# Altium PCB Pannel3.5x3.PcbDoc (part 4 of 4)
Units mil, origin at the board's own origin, x right, y up, seen from the top; angles counter-clockwise.
Board outline 3543.31 x 2771.65 mil, 4 copper layers (SIGNAL, GROUND, PWR, SIGNAL (Bottom)), stack 61.627 mil thick; 248 components, 189 nets, 921 pads, 651 vias.
Unrouted connection lines stored in the file: 1.
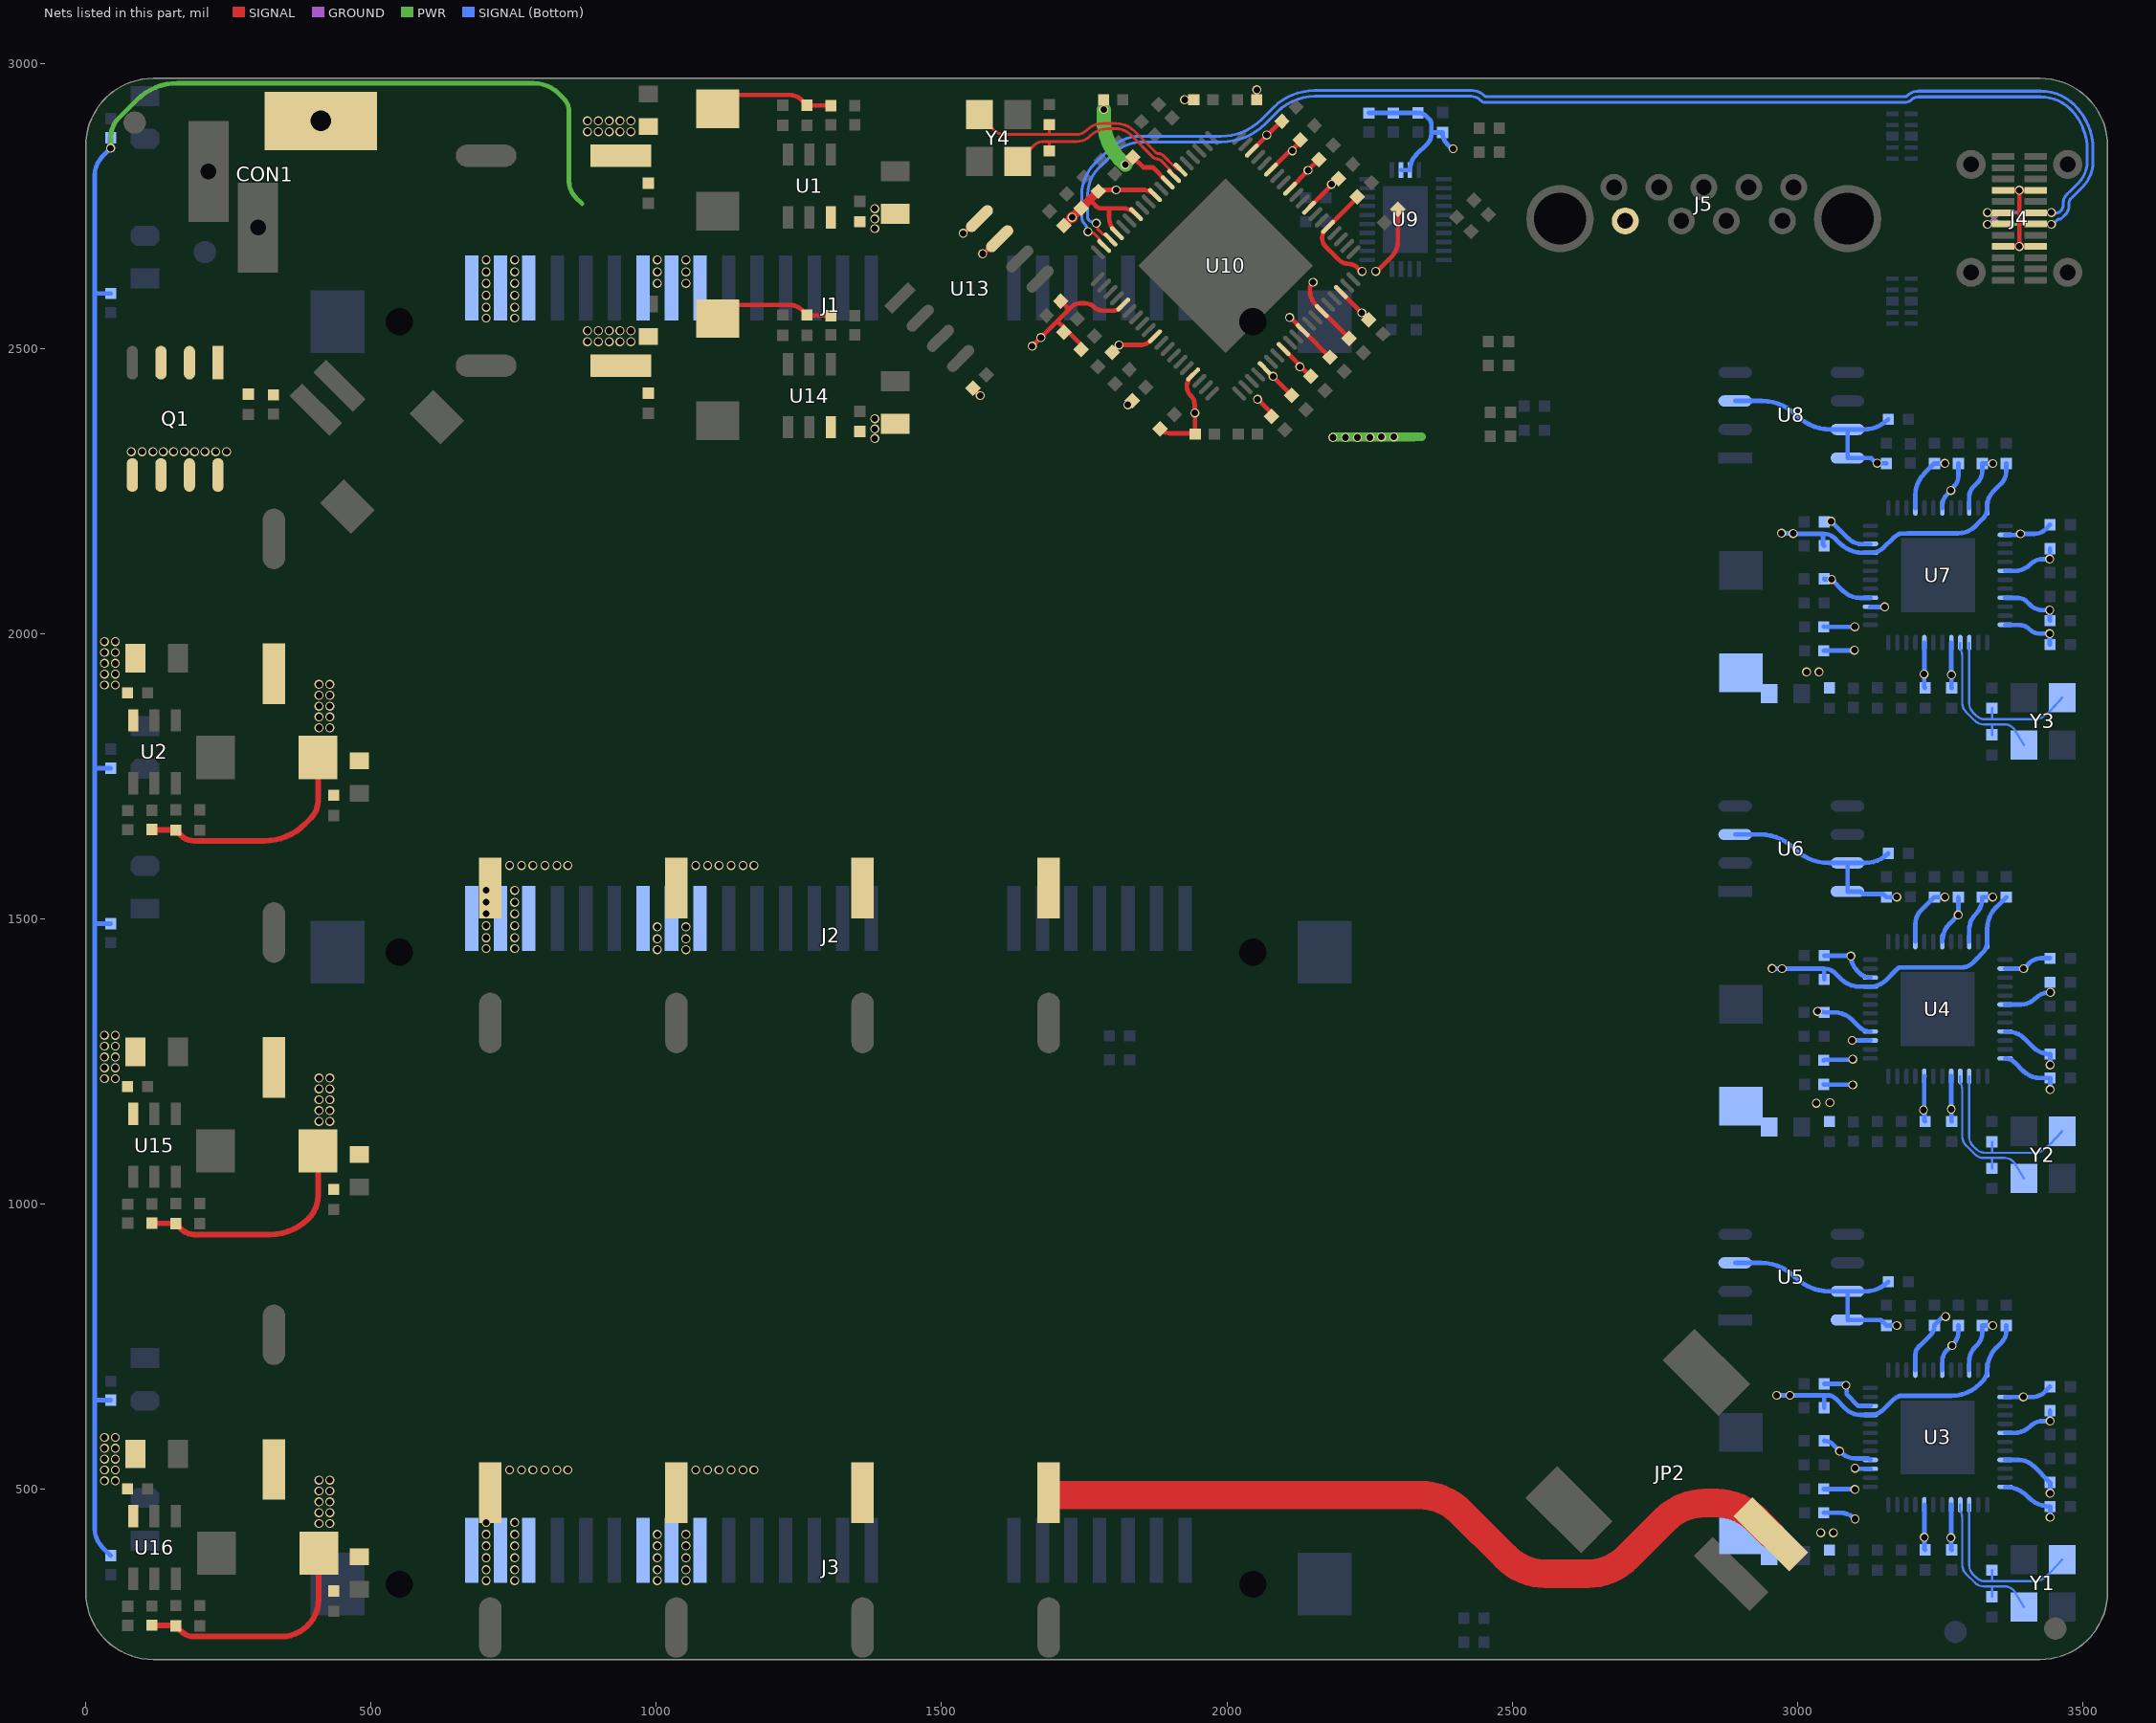
[diagram p6: the nets of this part, all layers, seen from the top]

## Via types
v1: diameter 15.75, hole 11.81, SIGNAL to SIGNAL (Bottom), tented both sides, 651 vias

## Nets (pads, with @x,y where several pads share a name; then routed paths per layer and width w, separated by ;. In a path a pad name is that pad's centre, name@x,y a point inside that pad or via, vN(x,y) a via of type N, cw(c..) or ccw(c..) an arc to the next point about the centre after c; other vN are vias at no path point) (continued)
USBD_N: J4.A7 J4.B7 U10.56 | length 2361.9
  SIGNAL w5.1: v1(1756.66,2704.66) 1758.69,2702.62 1766.22,2702.62 1769.64,2699.2 1776.14,2692.7 1776.14,2688.67 U10.56@1785.02,2679.79 ; v1(3333,2738.38) 3333.26,2738.11 3360.39,2738.11 J4.B7@3360.66,2737.85 ; J4.A7@3417.35,2718.16 3417.61,2717.89 3444.73,2717.89 v1(3445,2717.63)
  PWR w5.1: v1(3333,2738.38) 3334.06,2738.38 3344.44,2728 ccw(c3369.49,2753.05) 3369.49,2717.63 v1(3445,2717.63)
  SIGNAL (Bottom) w5.1: 1751.3,2717.54 cw(c1764.61,2730.83) 1745.8,2730.83 1745.8,2769.32 cw(c1822.49,2769.32) 1768.26,2823.55 1794.02,2849.3 ; 1751.35,2717.49 cw(c1743.4,2709.57) 1754.62,2709.57 ccw(c1761.57,2709.57) v1(1756.66,2704.66) ; 1794.03,2849.31 cw(c1848.82,2794.5) 1848.82,2872 1989.99,2872 ccw(c1989.99,2972) 2060.7,2901.29 2081.65,2922.24 cw(c2153.74,2850.15) 2153.74,2952.1 2430.42,2952.1 cw(c2430.42,2924.38) 2450.02,2943.98 ; 2450.03,2943.97 ccw(c2456.87,2950.84) 2456.87,2941.14 3187.93,2941.14 ccw(c3187.93,2948.22) 3192.92,2943.21 ; 3192.95,2943.23 cw(c3211.97,2924.18) 3211.97,2951.1 3426.42,2951.1 cw(c3426.42,2867.17) 3485.77,2926.52 3485.99,2926.3 cw(c3408.36,2848.67) 3518.14,2848.67 3518.14,2828.22 cw(c3453.54,2828.22) 3499.27,2782.59 cw(c3453.54,2828.22) 3499.22,2782.54 3480.24,2763.56 3479.96,2763.56 ccw(c3489.51,2754.01) 3478.45,2761.77 ccw(c3489.51,2754.01) 3476,2754.01 3476,2750.21 cw(c3454.01,2750.21) 3469.56,2734.66 3463.36,2728.46 cw(c3459.4,2732.43) 3459.4,2726.82 ccw(c3459.4,2721.21) 3455.43,2725.18 ; v1(3445,2717.63) ccw(c3445,2724.58) 3449.92,2719.66 3455.43,2725.17
USBD_P: J4.A6 J4.B6 U10.55 | length 2302.2
  SIGNAL w5.1: v1(1771.33,2719.33) 1773.36,2717.29 1773.36,2709.76 1779.74,2703.38 1783.28,2699.84 1787.31,2699.84 U10.55@1796.19,2690.96 ; v1(3333,2717.63) 3333.26,2717.9 3360.39,2717.9 J4.B6@3360.66,2718.16 ; J4.A6@3417.35,2737.84 3417.61,2738.11 3444.73,2738.11 v1(3445,2738.37)
  GROUND w5.1: v1(3333,2717.63) 3334.06,2717.63 3344.44,2728 cw(c3369.48,2702.96) 3369.48,2738.37 v1(3445,2738.37)
  SIGNAL (Bottom) w5.1: v1(1771.33,2719.33) ccw(c1766.41,2714.41) 1766.41,2721.36 cw(c1766.41,2732.59) 1758.47,2724.65 cw(c1764.68,2730.86) 1755.9,2730.86 1755.9,2769.19 cw(c1822.81,2769.19) 1775.48,2816.48 1798.2,2839.2 cw(c1853,2784.4) 1798.24,2839.24 cw(c1853,2784.4) 1853,2861.9 1990.04,2861.9 ccw(c1990.04,2971.87) 2067.8,2894.11 2088.32,2914.63 cw(c2154.4,2848.55) 2154.4,2942 2428.32,2942 cw(c2428.32,2919.32) 2444.36,2935.36 ccw(c2454.78,2945.78) 2454.78,2931.04 3188,2931.04 ccw(c3188,2948.04) 3200.02,2936.02 cw(c3212.04,2924) 3212.04,2941 3426.24,2941 cw(c3426.24,2866.73) 3478.72,2919.28 ; v1(3445,2738.37) ccw(c3448.52,2741.89) 3448.52,2736.92 3451.62,2736.92 ccw(c3451.62,2751.19) 3461.72,2741.1 ccw(c3451.62,2751.19) 3465.9,2751.19 3465.9,2755.38 cw(c3486.2,2755.38) 3469.96,2767.56 cw(c3486.2,2755.38) 3471.85,2769.73 3475.77,2773.66 3476.06,2773.66 3492.05,2789.65 ccw(c3453.45,2828.25) 3508.04,2828.25 3508.04,2848.54 ccw(c3408.04,2848.54) 3478.75,2919.25
VBUS: C5.2 C6.2 C54.2 C55.2 C60.2 C61.2 C86.2 C87.2 C96.2 C129.2 C130.2 J4.A4 J4.A9 J4.B4 J4.B9 J5.1 R38.1 R39.1 R45.2 U1.3 U3.12 U3.45 U4.12 U4.45 U7.12 U7.45 U9.26 U9.27 U14.3 | length 2377.3
  SIGNAL w8: J4.B4@3360.66,2678.79 v1(3389,2678.79) ; J4.B9@3360.66,2777.21 v1(3389,2777.21) ; J4.A9@3417.35,2678.79 v1(3389,2678.79) ; J4.A4@3417.35,2777.21 v1(3389,2777.21) ; v1(3389,2678.79) v1(3389,2777.21)
  PWR w15: v1(2186,2344) v1@2186.2,2344 ; v1@2293,2344.65 v1@2292.65,2345 ; 2341,2345 2329,2345 ; v1@2186.2,2344 v1(2208,2344) v1(2229,2344) v1(2251,2344) ; v1@2186.2,2344 2187.2,2345 v1@2270.8,2345 ; v1(2251,2344) 2328,2344 2329,2345 ; v1(2251,2344) 2251.14,2344.14 2269.94,2344.14 v1@2270.8,2345 ; v1@2270.8,2345 v1(2271,2345) v1@2292.65,2345 ; v1@2292.65,2345 v1(2293,2345) 2329,2345
  SIGNAL (Bottom) w8: R38.1@2249,2912.73 2249.25,2912.99 R45.2@2335,2912.99 cw(c2335,2891.22) 2350.39,2906.61 2355,2902 cw(c2346.9,2893.9) 2358.35,2893.9 2358.35,2875.43 cw(c2335.18,2875.43) 2357.6,2869.56 cw(c2335.18,2875.43) 2351.57,2859.04 2332.01,2839.49 ccw(c2358.87,2812.62) U9.27@2320.88,2812.62 U9.26@2305.13,2812.62 ; 2359.59,2878.41 C96.2@2378,2878.41 ccw(c2406.87,2878.41) 2386.46,2858 2394.68,2849.77 v1(2396.6,2849.99) ; v1(2955.57,1413) 2955.66,1412.91 2973.06,1412.91 v1(2973.15,1412.82) 2979.95,1412.82 2980.01,1412.87 3047,1412.87 ; v1(2963.83,664.82) v1(2987,664.82) 3053,664.82 cw(c3053,645.06) 3066.96,659.04 3085,641 ccw(c3110.66,666.66) 3110.66,630.37 U3.45@3127.89,630.37 ccw(c3127.89,662.91) 3129.91,630.43 ccw(c3127.89,662.91) 3150.89,639.89 3168.57,657.57 ; v1(2972,2176) 2972.18,2175.82 2992.5,2175.82 v1(2992.68,2175.63) ; v1@2993,2176 2994,2175 3044,2175 ; C54.2@3047,643 3047,661 ; C60.2@3047,1394 3047,1412.87 ; C86.2@3047,2154 3044.84,2156.16 3044.84,2174.16 3044,2175 ; 3074.82,2158.18 3066.41,2166.59 ccw(c3046.11,2146.3) 3046.11,2175 3044,2175 ; 3074.84,2158.16 ccw(c3114.5,2197.87) 3114.5,2141.75 U7.45@3128,2141.75 ccw(c3128,2175.57) 3151.92,2151.65 3166.55,2166.29 cw(c3190,2142.83) 3171.04,2170.05 3176.58,2173.9 cw(c3181.15,2167.34) 3181.15,2175.34 3183.13,2175.34 ccw(c3183.13,2183.34) 3183.68,2175.36 3193,2176 3281.59,2176 ccw(c3281.59,2219.18) 3312.11,2188.63 ; 3076.1,1394.9 3065.99,1405.01 ccw(c3047,1386.01) 3047,1412.87 ; 3076.13,1394.87 ccw(c3108.76,1427.55) 3108.76,1381.37 U4.45@3127.89,1381.37 ccw(c3127.89,1420.59) 3130.11,1381.43 ccw(c3127.89,1420.59) 3155.61,1392.84 3173.04,1410.27 3175.38,1412.62 cw(c3181.04,1406.96) 3181.04,1414.96 3288.24,1414.96 ccw(c3288.24,1440.85) 3306.54,1422.54 3314.13,1430.13 3314.13,1430.23 3324.56,1440.66 ccw(c3305.11,1460.11) U4.12@3332.61,1460.11 3332.61,1482.5 cw(c3386.68,1482.5) 3348.45,1520.73 C61.2@3366,1538.28 ; 3168.59,657.59 cw(c3184,642.14) 3175.06,662.05 3177.76,663.26 cw(c3181.04,655.96) 3181.04,663.96 3269.89,663.96 ccw(c3269.89,733.9) 3319.33,684.43 3324.56,689.66 ccw(c3305.11,709.11) U3.12@3332.61,709.11 cw(c3389.36,709.11) 3349.21,749.21 ; 3312.13,2188.65 3324.77,2201.29 ; 3324.79,2201.31 ccw(c3305.58,2220.49) 3332.61,2218.05 ccw(c3305.58,2220.49) U7.12@3332.72,2220.49 ; U7.12@3332.61,2223.87 cw(c3368.2,2223.87) 3343.04,2249.04 3356.71,2262.71 ccw(c3334.27,2285.14) 3366,2285.14 C87.2@3366,2298.28 ; 3349.23,749.23 3358.47,758.47 ; 3358.47,758.47 ccw(c3340.31,776.64) 3366,776.64 C55.2@3366,787.28
  other v1: 1383,2342 1383,2359 1383,2377 1383,2710 1383,2727 1383,2745
VCC1.05V-VL822: C1.1 C9.2 C11.1 C115.2 C116.2 C117.2 C118.2 C119.2 C120.2 C121.2 C122.2 C123.2 C124.2 C125.2 C126.2 E9.1 L1.2 R1.1 U10.5 U10.8 U10.11 U10.14 U10.27 U10.30 U10.33 U10.36 U10.48 U10.51 U10.54 U10.67 | length 1296
  SIGNAL w8: L1.2@1108,2920.37 1131.91,2944.28 1233.54,2944.28 cw(c1233.54,2913.82) C9.2@1255.06,2935.37 ; C9.2@1255.08,2935.35 C9.2@1264,2926.43 1264.48,2925.95 1305.52,2925.95 R1.1@1306,2925.46 ; C116.2@1714.53,2715.47 v1(1729,2730) ; 1759.53,2760.47 1769.64,2750.36 ccw(c1781.43,2762.14) 1781.43,2745.47 1793.63,2745.47 ; C125.2@1774.53,2775.47 1782.79,2775.47 1785.39,2778.07 1851.94,2778.07 ; C120.2@1799,2493 1799,2493.53 v1@1811.06,2505.59 ; U10.54@1807.29,2702.06 1804.15,2705.2 cw(c1829.55,2730.6) 1793.63,2730.6 1793.63,2745.47 ; v1@1812.59,2506.13 1848.44,2506.13 ccw(c1848.44,2531.71) U10.67@1866.52,2513.6 ; U10.51@1840.74,2735.51 ccw(c1816.69,2711.46) 1816.69,2745.47 1793.63,2745.47 ; 1854.71,2778.07 cw(c1854.66,2766.14) 1857.95,2777.61 1860.57,2776.86 cw(c1851.94,2746.71) 1872.67,2770.25 cw(c1851.94,2746.71) U10.48@1874.12,2768.89 ; U10.67@1866.53,2513.62 1874.03,2521.11 U10.67@1874.12,2521.11 ; U10.36@2043.96,2846.81 2043.96,2846.9 2070,2872.94 v1(2070,2874) 2071,2874 2095.47,2898.47 C118.2@2096.47,2898.47 ; U10.33@2077.34,2813.43 v1@2111.95,2848.05 ; v1@2081.05,2450.48 2113.47,2418.06 C121.2@2113.47,2417.53 ; U10.8@2099.61,2498.84 2126.52,2471.93 2126.52,2469.48 v1(2128,2468) 2129.5,2468 2145.97,2451.53 C126.2@2147.47,2451.53 ; v1(2110.19,2554.2) 2110.91,2554.2 2132.9,2532.22 U10.11@2132.99,2532.22 2158.8,2506.41 2158.8,2506.2 C117.2@2180.47,2484.53 ; U10.30@2110.78,2779.99 2142.4,2811.6 v1(2142.4,2812.4) C123.2@2161.47,2831.47 ; v1(2114.87,2846.48) 2114.87,2848.57 2128.47,2862.17 C119.2@2128.47,2865.47 ; U10.27@2144.16,2746.61 v1@2183.48,2785.92 ; v1(2151.09,2616.03) ccw(c2164.72,2602.4) 2146.89,2609.74 ccw(c2164.72,2602.4) 2145.44,2602.4 ccw(c2183.22,2602.4) 2156.5,2575.68 2198.18,2534 2199,2534 2199,2533.5 2214.47,2518.03 C124.2@2214.47,2517.53 ; v1@2185,2787.21 C122.2@2195.26,2797.47
  SIGNAL w15: C116.2@1714.53,2715.47 v1@1729.05,2730 ; C115.2@1744.53,2745.47 v1(1729,2730) ; C125.2@1774.53,2775.47 1759.53,2760.47 C115.2@1744.53,2745.47 v1@1729.05,2730
  other v1: 2081.05,2451.02 1811.06,2506.13 1806,2778 2183.48,2787.72 879.57,2880 898.57,2880 917.57,2880 936.57,2880 955.57,2880 879.57,2899 898.57,2899 917.57,2899 936.57,2899 955.57,2899
VCC1V2-A: C32.2 C33.2 C38.2 C39.2 C40.2 C41.2 C42.2 C43.2 C44.2 C45.2 L4.2 U3.4 U3.10 U3.18 U3.21 U3.24 U3.29 U3.32 U3.40 | length 793
  SIGNAL (Bottom) w8: C43.2@3047,585 cw(c3047,563.27) 3062.36,578.64 v1(3074,567) 3075.93,565.07 ccw(c3102.31,591.44) 3084.34,558.75 ccw(c3102.31,591.44) 3102.31,554.14 3121.83,554.14 cw(c3121.83,545.57) U3.40@3127.89,551.63 ; U3.4@3206.63,709.11 3206.69,709.17 3206.69,726.43 3206.71,735.85 ccw(c3198.71,735.88) 3206.7,736.13 cw(c3223.57,736.7) 3206.69,736.7 cw(c3223.57,736.7) 3211.61,748.61 ; 3211.64,748.64 3215.05,752.05 ccw(c3203.14,764) 3215.09,752.09 3220.72,757.72 ccw(c3215.09,763.4) 3220.75,757.75 3232.73,769.73 ccw(c3215.17,787.28) 3234.81,772.1 ccw(c3215.17,787.28) C45.2@3240,787.28 3254.23,801.52 3258.11,801.52 v1(3259.59,803) ; U3.32@3222.38,472.89 3222.44,472.83 v1(3222.44,416) 3222.44,395.56 C42.2@3224,394 ; U3.29@3269.62,472.89 3269.62,415.62 v1(3269,415) 3269.61,414.39 3269.61,394.61 C41.2@3270.22,394 ; U3.10@3301.12,709.11 3301.12,724.24 cw(c3337.65,724.24) 3311.81,750.06 3315.15,753.41 ccw(c3293.79,774.77) 3324,774.77 C40.2@3324,787.28 v1(3342.28,787.28) ; U3.24@3364.11,504.39 cw(c3364.11,450.06) 3402.53,488.47 3405.56,485.44 ccw(c3442.84,522.72) C39.2@3442.84,470 3442.92,469.92 3442.92,451.08 v1(3443,451) ; U3.21@3364.11,551.63 3387.79,551.63 cw(c3387.79,514.41) 3414.11,540.73 C38.2@3442.84,512 3442.92,511.92 3442.92,493.08 v1(3443,493) ; U3.18@3364.11,598.87 3379.72,598.87 ccw(c3379.72,639.14) 3408.17,610.65 ; 3408.21,610.68 cw(c3430.04,588.82) 3430.04,619.72 v1(3442.84,619.72) C44.2@3442.84,638
  other v1: 3041,424 3063,424
VCC1V2-B: C34.2 C35.2 C46.2 C47.2 C48.2 C49.2 C50.2 C51.2 C52.2 C53.2 L5.2 U4.4 U4.10 U4.18 U4.21 U4.24 U4.29 U4.32 U4.40 | length 781.2
  SIGNAL (Bottom) w8: v1(3035.28,1338) 3036.28,1337 3046,1337 C51.2@3047,1336 3065.16,1336 cw(c3065.16,1292.94) 3095.58,1323.42 3108.22,1310.78 ccw(c3127.89,1330.44) 3126.02,1302.69 ccw(c3127.89,1330.44) U4.40@3127.89,1302.63 ; U4.4@3206.63,1460.11 3206.63,1491 cw(c3240.22,1491) 3216.45,1514.73 C53.2@3240,1538.28 v1(3258.28,1538.28) ; U4.32@3222.38,1223.89 3222.32,1223.83 3222.32,1166.32 v1(3221,1165) 3222.48,1163.52 3222.48,1146.52 C48.2@3224,1145 ; U4.29@3269.62,1223.89 3269.56,1223.83 v1(3269.56,1166.56) 3269.89,1166.23 3269.89,1145.33 C49.2@3270.22,1145 ; U4.10@3301.12,1460.11 3301.12,1480.94 cw(c3340.18,1480.94) 3312.54,1508.54 ccw(c3284.94,1536.18) 3324,1536.18 C50.2@3324,1538.28 v1(3342.14,1538.28) ; U4.24@3364.11,1255.39 cw(c3364.11,1231.93) 3380.7,1248.52 3395.97,1233.24 ccw(c3425.52,1262.79) 3425.52,1221 C47.2@3442.84,1221 3442.92,1220.92 3442.92,1201.08 v1(3443,1201) ; U4.21@3364.11,1302.63 3368.22,1302.63 cw(c3368.22,1261.22) 3370.5,1302.57 cw(c3368.22,1261.22) 3397.48,1290.52 3412.39,1275.61 ccw(c3442.84,1306.06) C46.2@3442.84,1263 3442.92,1262.92 3442.92,1244.08 v1(3443,1244) ; U4.18@3364.11,1349.87 3391.69,1349.87 ccw(c3391.69,1384.53) 3416.2,1360.03 cw(c3443.42,1332.81) 3432.84,1369.82 cw(c3443.42,1332.81) v1(3443.42,1371.3)
  other v1: 3033,1177 3057,1178
VCC1V2-C: C75.2 C76.2 C78.2 C79.2 C80.2 C81.2 C82.2 C83.2 C84.2 C85.2 L6.2 U7.4 U7.10 U7.18 U7.21 U7.24 U7.29 U7.32 U7.40 | length 769.4
  SIGNAL (Bottom) w8: C85.2@3047,2096 3047.5,2095.5 3059.5,2095.5 v1(3060,2095) 3079.81,2075.19 ccw(c3110.13,2105.51) 3110.13,2062.63 U7.40@3127.89,2062.63 ; U7.4@3206.63,2220.11 3206.63,2242.51 cw(c3260.71,2242.51) 3222.47,2280.75 C79.2@3240,2298.28 3240.36,2298.64 3240.54,2298.46 3258.1,2298.46 v1(3258.28,2298.64) ; U7.32@3222.38,1983.89 3222.44,1983.83 3222.44,1929.44 v1(3222,1929) 3222,1907 C78.2@3224,1905 ; U7.29@3269.62,1983.89 3269.69,1983.83 3269.69,1928.31 v1(3270,1928) 3270.11,1927.89 3270.11,1905.11 C83.2@3270.22,1905 ; U7.10@3301.12,2220.11 3301.12,2240.26 cw(c3324.92,2240.26) 3308.08,2257.08 3315.06,2264.06 ccw(c3293.48,2285.64) 3324,2285.64 C80.2@3324,2298.28 v1(3342.28,2298.28) ; U7.24@3364.11,2015.39 3388.32,2015.39 cw(c3388.32,1989.12) 3406.89,2007.7 ccw(c3425.47,2026.27) 3425.47,2000 v1(3442,2000) 3442.42,1999.58 3442.42,1981.42 C81.2@3442.84,1981 ; U7.21@3364.11,2062.63 3386.84,2062.63 cw(c3386.84,2041.18) 3401.99,2056.37 3408.29,2050.06 ccw(c3429.49,2071.26) 3429.49,2041.28 v1(3441.91,2041.28) ; U7.18@3364.11,2109.87 3380.29,2109.87 ccw(c3380.29,2148.94) 3407.92,2121.32 3408.59,2121.99 cw(c3429.66,2100.92) 3429.66,2130.72 v1(3442,2130.72) ; v1@3442.37,2040.83 3442.37,2023.46 C84.2@3442.84,2023 ; v1@3442.84,2130.72 C82.2@3442.84,2149
  other v1: 3016,1933 3038,1933
VCC3.3V-VL822: C15.1 C110.2 C111.2 C112.2 C113.2 C114.2 C133.2 C135.1 E11.1 L3.2 R5.1 R8.2 R20.1 R21.1 R22.1 R23.1 R24.1 R25.1 R40.2 R41.2 R42.2 R43.2 R48.2 R50.2 R52.2 R54.2 R55.2 U10.17 U10.24 U10.46 U10.62 U10.73 U13.7 U13.8 | length 5146.3
  SIGNAL w8: L3.2@1108,2552.37 1131.91,2576.28 1234,2576.28 cw(c1234,2546.92) 1254.75,2567.68 C133.2@1264,2558.43 1264.48,2557.95 1305.52,2557.95 R5.1@1306,2557.46 ; v1(1538,2702) 1539.47,2702 1565.1,2727.63 U13.8@1566.56,2727.63 ; R8.2@1553.83,2430.17 R8.2@1555.17,2430.17 v1(1568,2417.34) ; v1(1572,2666) 1573.82,2666 1600.1,2692.27 U13.7@1601.92,2692.27 ; v1(1659,2504) v1(1674.19,2519.19) 1689.37,2534.37 1689.48,2534.37 1703.02,2547.91 ; C112.2@1709,2583 1723.56,2568.45 ; 1728.83,2573.72 1723.56,2568.45 ; 1728.84,2573.73 cw(c1741.57,2560.98) 1741.57,2579 1751.94,2579 cw(c1751.94,2557.12) 1767.41,2572.59 ccw(c1782.88,2588.06) 1782.88,2566.18 1800.4,2566.18 ccw(c1800.4,2584.25) U10.62@1813.17,2571.47 ; R41.2@1744.34,2498.34 1744.34,2506.66 1725.95,2525.05 1725.88,2525.05 1722.6,2528.34 R42.2@1714.34,2528.34 1714.34,2536.6 1703.02,2547.91 ; v1(1784.27,2918.73) R50.2@1784.27,2936 ; v1(1822,2822) C114.2@1835.53,2835.47 ; v1(1826.69,2401.16) 1826.93,2401.16 1834.1,2408.34 R40.2@1834.34,2408.34 ; C114.2@1835.53,2835.47 1853.53,2817.47 1870.08,2817.47 U10.46@1896.39,2791.16 ; C110.2@1882.95,2358.95 ccw(c1902.13,2378.13) 1897.08,2351.47 ccw(c1902.13,2378.13) 1902.13,2351 1943.54,2351 R43.2@1944.54,2350 1944.27,2350.27 1944.27,2386.73 v1(1944,2387) 1944,2398.43 1942.97,2406.02 ccw(c1926.25,2403.75) 1938.18,2415.68 1936.89,2416.97 cw(c1953.53,2433.61) 1930,2433.61 cw(c1953.53,2433.61) 1936.88,2450.24 U10.73@1940.94,2454.29 ; v1(1926,2936) R52.2@1942.27,2936 ; R54.2@2052.46,2936 v1(2052.46,2953.54) ; v1(2054.03,2411.03) 2078.17,2386.89 R48.2@2078.17,2380.83 ; U10.17@2199.81,2599.04 2221.01,2577.83 2221.17,2577.83 v1(2236.64,2562.36) ; C113.2@2228.47,2765.47 2228.47,2764.17 2173.27,2708.97 ccw(c2188.4,2693.84) 2167,2693.84 ccw(c2188.4,2693.84) 2173.26,2678.72 2196.95,2655.03 ccw(c2212.95,2671.02) 2212.95,2648.4 cw(c2212.95,2625.92) 2228.84,2641.82 2235.43,2635.23 v1(2237.2,2635.23) ; v1@2236.39,2562.11 2247.97,2550.53 C111.2@2248.47,2550.53 ; v1(2261,2635) 2262.8,2635 2288.9,2661.1 ccw(c2262.5,2687.5) 2299.83,2687.5 R55.2@2299.83,2743.83 ; 1703.02,2547.91 1723.56,2568.45
  PWR w8: v1(44,2851) 44,2870.38 cw(c90.78,2870.38) 57.7,2903.46 90.05,2935.81 cw(c160.76,2865.1) 160.76,2965.1 785.09,2965.1 cw(c785.09,2903.03) 828.95,2946.95 ; 828.98,2946.92 838.07,2937.83 ; 838.08,2937.81 cw(c816.12,2915.88) 847.16,2915.88 847.16,2793.13 ccw(c886.47,2793.13) 858.65,2765.35 870.19,2753.81
  PWR w25: v1(1784.27,2918.73) 1784.27,2901.15 ccw(c1884.27,2901.15) 1813.56,2830.44 v1(1822,2822)
  SIGNAL (Bottom) w8: R21.1@44,383.73 30,397.73 cw(c63.8,431.53) 16,431.53 16,655 ; R20.1@44,656.27 17.27,656.27 16,655 ; R23.1@44,1491.73 17.27,1491.73 16,1493 ; R22.1@44,1764.27 17.73,1764.27 16,1766 ; R25.1@44,2596.46 19.54,2596.46 16,2600 ; v1(44,2851) 30,2837 ccw(c63.8,2803.2) 16,2803.2 16,2600 ; 16,655 16,1493 ; 16,1493 16,1766 ; 16,1766 16,2600
  SIGNAL (Bottom) w10: v1(44,2851) R24.1@44,2869.27
  other v1: 879.57,2512 898.57,2512 917.57,2512 936.57,2512 955.57,2512 879.57,2531 898.57,2531 917.57,2531 936.57,2531 955.57,2531
VCC3V3-A: C36.2 C56.2 C57.2 C58.2 C59.2 R26.1 R28.1 U3.7 U3.14 U3.39 U3.46 U5.3 U5.7 U5.8 | length 853.7
  SIGNAL (Bottom) w8: U5.3@2890.97,897 2935.64,897 cw(c2935.64,811.64) 2995.96,872.04 cw(c2935.64,811.64) 2996,872 ccw(c3056.36,932.36) 2996.04,871.96 ccw(c3056.36,932.36) 3056.36,847 U5.7@3087.82,847 ; R28.1@3046.02,459 3074.44,459 cw(c3074.44,421.44) 3092.56,454.34 cw(c3074.44,421.44) v1(3101,448) ; R26.1@3046.02,501 3046.6,500.42 3100.25,500.42 v1(3100.83,499.84) ; C56.2@3047,685 v1@3080.24,685 ; v1(3085,682.34) 3086.48,680.86 3086.48,666.52 3106.82,646.18 3127.83,646.18 U3.46@3127.89,646.12 ; v1(3101,537) 3102.06,535.94 3127.83,535.94 U3.39@3127.89,535.88 ; C58.2@3159.28,864 cw(c3118.24,905.04) 3118.24,847 U5.7@3087.82,847 ; v1(3174.28,787.28) C36.2@3156,787.28 3146.28,797 U5.8@3087.82,797 U5.7@3087.82,847 ; U3.7@3253.87,709.11 3253.87,724.38 cw(c3282.09,724.38) 3262.12,744.31 ; 3262.14,744.34 v1@3270.4,752.6 ; v1(3271,752) 3272.67,753.67 ccw(c3250.16,776.19) 3278.42,761.51 ccw(c3250.16,776.19) 3282,776.19 C59.2@3282,787.28 ; U3.14@3364.11,661.87 3411.78,661.87 ccw(c3411.78,693.05) 3414.67,662 ccw(c3411.78,693.05) 3433.84,671 C57.2@3442.84,680 ; v1(3396,662) 3410.42,662
VCC3V3-B: C37.2 C62.2 C63.2 C64.2 C65.2 R27.1 R29.1 U4.7 U4.14 U4.39 U4.46 U6.3 U6.7 U6.8 | length 838.3
  SIGNAL (Bottom) w8: U6.3@2890.97,1648 2934.64,1648 cw(c2934.64,1562.64) 2994.96,1623.04 cw(c2934.64,1562.64) 2995,1623 ccw(c3055.36,1683.36) 2995.04,1622.96 ccw(c3055.36,1683.36) 3055.36,1598 U6.7@3087.82,1598 ; R29.1@3046.02,1210 3046.52,1209.5 3096.5,1209.5 v1@3097.5,1208.5 ; R27.1@3046.02,1252 3047.02,1253 3096,1253 v1(3097,1254) ; C62.2@3047,1436 3047.58,1435.42 3093.23,1435.42 v1(3093.81,1434.84) ccw(c3129.1,1434.84) 3093.88,1432.67 ccw(c3129.1,1434.84) 3095.3,1424.72 ccw(c3129.1,1434.84) 3104.15,1409.88 3109.15,1404.88 3109.61,1404.42 ; v1(3095.93,1287.01) 3096.05,1286.88 U4.39@3127.89,1286.88 ; 3109.63,1404.4 ccw(c3118.05,1412.87) 3110.38,1403.71 3110.88,1403.3 ccw(c3127.89,1423.62) 3114.2,1400.93 ccw(c3127.89,1423.62) 3114.6,1400.69 ccw(c3127.89,1423.62) U4.46@3127.89,1397.12 ; C63.2@3159.28,1615 cw(c3118.24,1656.04) 3118.24,1598 U6.7@3087.82,1598 ; v1(3174.28,1538.28) C37.2@3156,1538.28 3150.85,1543.43 3115.23,1543.43 3110.67,1548 U6.8@3087.82,1548 U6.7@3087.82,1598 ; U4.7@3253.87,1460.11 cw(c3299.17,1460.11) 3267.12,1492.12 ; 3267.14,1492.14 v1(3282,1507) C65.2@3282,1538.28 ; U4.14@3364.11,1412.87 v1(3396.34,1412.87) 3405.41,1421.93 ; 3405.43,1421.95 cw(c3427.3,1400.04) 3427.3,1431 C64.2@3442.84,1431
  other v1: 3097,1209
VCC3V3-C: C77.2 C88.2 C89.2 C90.2 C91.2 R34.1 R35.1 U7.7 U7.14 U7.39 U7.46 U8.3 U8.7 U8.8 | length 799.6
  SIGNAL (Bottom) w5.1: R34.1@3046.02,2012 R34.1@3046.57,2012.55
  SIGNAL (Bottom) w8: U8.3@2890.97,2408 2937.64,2408 cw(c2937.64,2322.64) 2997.96,2383.04 cw(c2937.64,2322.64) 2998,2383 ccw(c3058.36,2443.36) 2998.04,2382.96 ccw(c3058.36,2443.36) 3058.36,2358 U8.7@3087.82,2358 ; R35.1@3046.02,1970 3046.52,1970.5 3099.5,1970.5 v1(3100,1971) ; R34.1@3046.57,2012.55 3047.12,2012 v1(3100.56,2012) ; v1(3059,2197) 3088.63,2167.37 ccw(c3113.39,2192.13) 3113.39,2157.12 U7.46@3127.89,2157.12 ; U7.39@3127.89,2046.88 3127.95,2046.94 3152.94,2046.94 v1(3153,2047) ; C77.2@3156,2298.28 3155.64,2298.64 3140.36,2298.64 v1(3140,2299) 3138.35,2299 3129.35,2308 U8.8@3087.82,2308 U8.7@3087.82,2358 ; C90.2@3159.28,2376 cw(c3115.83,2419.46) 3115.83,2358 U8.7@3087.82,2358 ; U7.7@3253.98,2220.49 3253.98,2224.91 cw(c3279.54,2224.91) 3261.45,2242.96 ; 3261.47,2242.98 3269,2250.51 v1(3269,2251) 3269,2253.1 3275.5,2259.6 ccw(c3259.81,2275.29) 3282,2275.29 C91.2@3282,2298.28 ; U7.14@3364.11,2172.87 3364.17,2172.93 3386.83,2172.93 3388.9,2175 v1(3391,2175) 3415.52,2175 ccw(c3415.52,2202.31) 3434.83,2182.99 C88.2@3442.84,2191
VCC5V-A: C2.1 C10.2 C13.1 E10.1 J1.P7 J1.P8 J1.P9 L2.2 R2.1 | length 407.5
  SIGNAL w10: R2.1@116,1656.79 116.55,1656.23 157.45,1656.23 C10.2@158,1655.68 167.54,1646.14 ccw(c190,1668.6) 190,1636.84 313.42,1636.84 ccw(c313.42,1736.84) 384.13,1666.13 394.9,1676.9 ccw(c364.81,1707) 407.37,1707 L2.2@407.37,1783
  other v1: 409,1835 428,1835 409,1854 428,1854 409,1873 428,1873 409,1892 428,1892 409,1911 428,1911 1002,2614.24 1052,2614.24 1002,2634.24 1052,2634.24 1002,2655.24 1052,2655.24
VCC5V-B: C16.1 C134.2 C137.1 E12.1 J2.P7 J2.P8 J2.P9 L7.2 R6.1 | length 411.8
  SIGNAL w10: R6.1@116,966.79 116.55,966.23 157.45,966.23 C134.2@158,965.68 167.54,956.14 ccw(c190,978.6) 190,946.84 323.49,946.84 ccw(c323.49,1041.84) 390.66,974.66 ; 390.68,974.68 ccw(c350.32,1015) 407.37,1015 L7.2@407.37,1093
  other v1: 409,1145 428,1145 409,1164 428,1164 409,1183 428,1183 409,1202 428,1202 409,1221 428,1221 1002,1445.98 1052,1445.98 1002,1464.98 1052,1464.98 1002,1485.98 1052,1485.98
VCC5V-C: C139.1 C143.2 C144.1 E13.1 J3.P7 J3.P8 J3.P9 L8.2 R10.1 | length 417.2
  SIGNAL w10: R10.1@116,261.79 116.55,261.23 157.45,261.23 C143.2@158,260.68 167.42,251.26 ccw(c190.17,274) 190.17,241.84 342.51,241.84 ccw(c342.51,307.8) 389.16,261.16 ccw(c342.51,307.8) 408.48,307.8 L8.2@408.48,388
  other v1: 1002,340 1052,340 1002,359 1052,359 1002,380 1052,380 1002,401 1052,401 1002,421 1052,421 409,440 428,440 409,459 428,459 409,478 428,478 409,497 428,497 409,516 428,516
VCC12V: C7.2 C8.2 C131.2 C132.2 C141.2 C142.2 E1.1 E2.1 E3.1 E4.1 E5.1 E6.1 E7.1 E8.1 J1.P13 J1.P14 J1.P15 J2.P13 J2.P14 J2.P15 J3.P13 J3.P14 J3.P15 JP2.1 Q1.5 Q1.6 Q1.7 Q1.8 U2.3 U15.3 U16.3 | length 1369.8
  SIGNAL w50: E5.1@1693.31,490 2338.58,490 cw(c2338.58,390) 2409.29,460.71 2488.71,381.29 ccw(c2559.42,452) 2559.42,352 2631.58,352 ccw(c2631.58,452) 2702.29,381.29 2767.59,446.59 cw(c2838.3,375.88) 2838.3,475.88 2857.3,475.88 cw(c2857.3,375.88) 2915.34,457.31 cw(c2857.3,375.88) 2928.01,446.59 JP2.1@2953.46,421.13
  other v1: 702,340 752,340 702,359 752,359 702,380 752,380 702,401 752,401 702,421 752,421 702,442 752,442 33,515 52,515 33,534 52,534 743,534 764,534 784,534 805,534 826,534 845,534 1069.2,534 1090.2,534 1110.2,534 1131.2,534 1152.2,534 1171.2,534 33,553 52,553 33,572 52,572 33,591 52,591 33,1220 52,1220 33,1239 52,1239 33,1258 52,1258 33,1277 52,1277 33,1296 52,1296 702,1447.98 752,1447.98 702,1466.98 752,1466.98 702,1487.98 752,1487.98 702,1508.98 752,1508.98 702,1528.98 752,1528.98 702,1549.98 752,1549.98 743,1593.67 764,1593.67 784,1593.67 805,1593.67 826,1593.67 845,1593.67 1069.2,1593.67 1090.2,1593.67 1110.2,1593.67 1131.2,1593.67 1152.2,1593.67 1171.2,1593.67 33,1910 52,1910 33,1929 52,1929 33,1948 52,1948 33,1967 52,1967 33,1986 52,1986 80,2319 99,2319 118,2319 136,2319 154,2319 173,2319 191,2319 209,2319 228,2319 247,2319 702,2553.24 752,2553.24 702,2572.24 752,2572.24 702,2593.24 752,2593.24 702,2614.24 752,2614.24 702,2634.24 752,2634.24 702,2655.24 752,2655.24
VIN: C127.1 CON1.1 Q1.1 Q1.2 Q1.3 R11.1
XIN: C109.1 U10.45 Y4.3 | length 338.3
  SIGNAL w5.1: Y4.3@1633.46,2827.66 1661.4,2855.6 cw(c1679.27,2837.73) 1679.27,2863 1688,2863 ; C109.1@1689,2846.43 1689,2862 1688,2863 ; U10.45@1903.05,2806.7 ccw(c1893.13,2806.7) 1900.14,2813.72 1884.57,2829.29 ccw(c1878.03,2822.76) 1878.03,2832 cw(c1878.03,2841.24) 1871.5,2834.71 1831.6,2874.6 ccw(c1805.74,2848.74) 1805.74,2885.31 1791.52,2885.31 ccw(c1791.52,2841.34) 1760.43,2872.43 cw(c1737.64,2895.26) 1737.64,2863 1688,2863
XIN-A: C71.1 U3.28 Y1.3 | length 269.3
  SIGNAL (Bottom) w4: U3.28@3285.37,472.89 3285.37,463.05 3287.11,458.93 cw(c3266.84,450.38) 3288.84,450.38 3288.84,367.68 ccw(c3310.84,367.68) 3295.24,352.16 3311.02,336.39 ccw(c3326.52,352) 3326.52,330 3341,330 ; C71.1@3341,311.72 3341,330 ; Y1.3@3397,294 3382.48,317.59 ccw(c3362.68,308) 3362.75,330 3341,330
XIN-B: C73.1 U4.28 Y2.3 | length 269.3
  SIGNAL (Bottom) w4: U4.28@3285.37,1223.89 3285.37,1214.05 3287.11,1209.93 cw(c3266.84,1201.38) 3288.84,1201.38 3288.84,1118.68 ccw(c3310.84,1118.68) 3295.24,1103.16 3311.02,1087.39 ccw(c3326.52,1103) 3326.52,1081 3341,1081 ; C73.1@3341,1062.72 3341,1081 ; Y2.3@3397,1045 3382.48,1068.59 ccw(c3362.68,1059) 3362.75,1081 3341,1081
XIN-C: C95.1 U7.28 Y3.3 | length 269.3
  SIGNAL (Bottom) w4: U7.28@3285.37,1983.89 3285.37,1974.05 3287.11,1969.93 cw(c3266.84,1961.38) 3288.84,1961.38 3288.84,1878.68 ccw(c3310.84,1878.68) 3295.24,1863.16 3311.02,1847.39 ccw(c3326.52,1863) 3326.52,1841 3341,1841 ; C95.1@3341,1822.72 3341,1841 ; Y3.3@3397,1805 3382.48,1828.59 ccw(c3362.68,1819) 3362.75,1841 3341,1841
XOUT: C108.1 U10.44 Y4.1 | length 419.6
  SIGNAL w5.1: Y4.1@1566.54,2908.37 1592.36,2882.54 ccw(c1610.57,2900.75) 1610.57,2875 1690,2875 ; Y4.1@1571.86,2890.65 cw(c1562.4,2888.99) Y4.1@1572,2889 ; C108.1@1689,2892.28 1689,2876 1690,2875 ; 1838.01,2881.06 ccw(c1805.74,2848.74) 1805.74,2894.41 1782.55,2894.41 ccw(c1782.55,2855.46) 1754.99,2882.99 cw(c1735.69,2902.31) 1735.69,2875 1690,2875 ; 1838.04,2881.04 1840.54,2878.54 1875.02,2844.05 ccw(c1881.56,2850.59) 1881.56,2841.35 cw(c1881.56,2832.1) 1888.09,2838.64 1909.5,2817.23 ccw(c1918.66,2826.39) U10.44@1918.66,2813.43
XOUT-A: C70.1 U3.27 Y1.1 | length 318
  SIGNAL (Bottom) w4: U3.27@3301.12,472.89 3301.12,366.71 ccw(c3323.12,366.71) 3307.52,351.19 3313.31,345.4 ccw(c3328.83,361) 3328.83,339 3341,339 ; C70.1@3341,358.28 3341,339 ; Y1.1@3463.93,376.68 3442.31,353.09 3431.01,343.92 cw(c3417.14,361) 3417.14,339 3341,339
XOUT-B: C72.1 U4.27 Y2.1 | length 318
  SIGNAL (Bottom) w4: U4.27@3301.12,1223.89 3301.12,1117.71 ccw(c3323.12,1117.71) 3307.52,1102.19 3313.31,1096.4 ccw(c3328.83,1112) 3328.83,1090 3341,1090 ; C72.1@3341,1109.28 3341,1090 ; Y2.1@3463.93,1127.68 3442.31,1104.09 3431.01,1094.92 cw(c3417.14,1112) 3417.14,1090 3341,1090
XOUT-C: C94.1 U7.27 Y3.1 | length 318
  SIGNAL (Bottom) w4: U7.27@3301.12,1983.89 3301.12,1877.71 ccw(c3323.12,1877.71) 3307.52,1862.19 3313.31,1856.4 ccw(c3328.83,1872) 3328.83,1850 3341,1850 ; C94.1@3341,1869.28 3341,1850 ; Y3.1@3463.93,1887.68 3442.31,1864.09 3431.01,1854.92 cw(c3417.14,1872) 3417.14,1850 3341,1850
pads on no net: J1. J1.P1 J1.P2 J1.P3 J1.SH1 J1.SH2 J2. J2.P1 J2.P2 J2.P3 J2.SH1 J2.SH2 J3. J3.P1 J3.P2 J3.P3 J3.SH1 J4.A8 J4.B8 MR1.Mark MR2.Mark MR3.Mark MR4.Mark U1.5 U2.5 U3.16 U3.17 U3.25 U3.35 U3.41 U3.48 U4.16 U4.17 U4.25 U4.35 U4.41 U4.48 U7.16 U7.17 U7.25 U7.35 U7.41 U7.48 U9.11 U9.12 U9.14 U9.15 U9.16 U9.22 U10.2 U10.21 U10.39 U10.42 U10.57 U10.58 U10.59 U10.60 U10.61 U10.63 U10.64 U10.76 U14.5 U15.5 U16.5

## Polygon pours and split planes (outlines as drawn)
GND on PWR "GND_L03_P047" (solid, remove dead copper, pour order 47): 118.36,201.69 cw(c118.4,319.85) 0.25,319.8 0.25,2855.24 cw(c118.34,2855.26) 118.36,2973.35 3425.45,2973.35 cw(c3425.54,2855.33) 3543.56,2855.24 3543.56,319.8 cw(c3425.47,319.78) 3425.45,201.69
VCC1.05V-VL822 on PWR "VCC1.05V-VL822_L03_P045" (solid, remove dead copper, pour order 45): 854,2974 854,2770 1522,2770 1855,2437 2118,2437 2199,2518 2199,2797 2103,2893 1775,2893 1765,2903 1765,2974
VBUS on PWR "VBUS_L03_P046" (solid, remove dead copper, pour order 46): 2311,2968.75 3544.25,2968.75 3634,2879 3634,247 3559,172 1567,172 1567,2282 1616,2331 2310,2331 2311,2330
VCC3V3-A on PWR "VCC3V3-A_L03_P003" (solid, remove dead copper, pour order 3): 3120.5,712 3084,712 3071,699 3071,619 3089,601 3089,449 3105,433 3367,433 3402,468 3402,690 3329,763 3280,763 3232,811 3131,811 3126,806 3126,790.1 3143.1,773 3220,773 3221,772 3236,772 3252,756 3252,723 3241,712
VCC3V3-B on PWR "VCC3V3-B_L03_P004" (solid, remove dead copper, pour order 4): 3096,1462 3081,1447 3081,1206 3099,1188 3368,1188 3396.34,1216.34 3396.34,1469.82 3341.16,1525 3257,1525 3218,1564 3152,1564 3145,1557 3145,1542 3165,1522 3205,1522 3216,1511 3253.69,1511 3257.69,1507 3257.69,1487.69 3232,1462 3188.51,1462
VCC3V3-C on PWR "VCC3V3-C_L03_P001" (solid, remove dead copper, pour order 1): 3053,2208 3035,2190 3035,2138 3055,2118 3079,2118 3090,2107 3090,1960 3107,1943 3372,1943 3406,1977 3406,2233 3372,2267 3269,2267 3226,2310 3136,2310 3132,2306 3132,2276 3147,2261 3239,2261 3249,2251 3249,2198 3241,2190 3148,2190 3129,2209 3118,2209 3054,2209
VCC3.3V-VL822 on PWR "VCC3.3V-VL822_L03_P044" (solid, remove dead copper, pour order 44): 854,2501.93 962.29,2501.93 978,2517.64 978,2650 994,2666 1079,2666 1099,2646 1099,2330 2311,2330 2311,2977 1765,2977 1765,2903 1775,2893 1943,2893 2103,2893 2199,2797 2199,2518.55 2117.45,2437 1855,2437 1522,2770 854,2770
VCC5V-A on PWR "VCC5V-A_L03_P036" (solid, remove dead copper, pour order 36): 353,1847 372,1828 489,1828 532,1871 532,2232 600,2300 1072,2300 1099,2327 1099,2646 1079,2666 994,2666 978,2650 978,2517.64 962.29,2501.93 468.93,2501.93 353,2386
VCC5V-B on PWR "VCC5V-B_L03_P038" (solid, remove dead copper, pour order 38): 372,1148 389,1131 993,1131 1101,1239 1101,1485 1087,1499 968,1499 495,1499 372,1376
VCC5V-C on PWR "VCC5V-C_L03_P039" (solid, remove dead copper, pour order 39): 413,546 399,532 399,431 413,417 636,417 674,455 922,455 964,413 964,338 976,326 1097,326 1110,339 1110,499 1093,516 740,516 710,546
VCC1V2-C on PWR "VCC1V2-C_L03_P006" (solid, remove dead copper, pour order 6): 3076,2109 3082,2103 3082,1958 3102,1938 3375.83,1938 3413,1975.17 3413,2235 3377,2271 3270,2271 3231,2310 3422,2310 3476,2256 3476,1939 3425,1888 3028,1888 3007,1909 3007,2099 3017,2109
VCC1V2-A on PWR "VCC1V2-A_L03_P015" (solid, remove dead copper, pour order 15): 3045.39,601 3032,588.42 3032,401 3059,374 3436,374 3477,415 3477,770 3436,811 3232,811 3280,763 3329,763 3402,690 3402,468 3367,433 3105,433 3089,449 3089,601
VCC1V2-B on PWR "VCC1V2-B_L03_P007" (solid, remove dead copper, pour order 7): 3066,1354 3074,1346 3074,1199 3093,1180 3376,1180 3406,1210 3406,1469 3344.74,1530.26 3251.74,1530.26 3218,1564 3384,1564 3455,1493 3455,1188 3410,1143 3050,1143 3013,1180 3013,1348 3019,1354
GND on SIGNAL "GND_L01_P054" (solid, remove dead copper, pour order 54): 678,320.33 663,305.33 663,215.33 680,198.33 1701,198.33 1708,205.33 1708,310.33 1698,320.33
GND on SIGNAL "GND_L01_P053" (solid, remove dead copper, pour order 53): 678,1380 663,1365 663,1275 680,1258 1701,1258 1708,1265 1708,1370 1698,1380
GND on SIGNAL "GND_L01_P052" (solid, remove dead copper, pour order 52): 144,1996 138,1990 138,1938.28 111,1911.28 111,1881 118,1874 141,1874 143,1872 143,1831 147.24,1826.76 172.95,1826.76 188,1841.81 188,1991 183,1996
GND on SIGNAL "GND_L01_P051" (solid, remove dead copper, pour order 51): 144,1306 138,1300 138,1248.28 111,1221.28 111,1191 118,1184 141,1184 143,1182 143,1141 147.24,1136.76 172.95,1136.76 188,1151.81 188,1301 183,1306
GND on SIGNAL "GND_L01_P050" (solid, remove dead copper, pour order 50): 144,601 138,595 138,543.28 111,516.28 111,486 118,479 141,479 143,477 143,436 147.24,431.76 172.95,431.76 188,446.81 188,596 183,601
VCC12V on SIGNAL "VCC12V_L01_P048" (solid, remove dead copper, pour order 48): 675,1594.67 675,1509.67 685,1499.67 1711,1499.67 1718,1506.67 1718,1599.67 1713,1604.67 685,1604.67
VCC12V on SIGNAL "VCC12V_L01_P049" (solid, remove dead copper, pour order 49): 675,535 675,450 685,440 1711,440 1718,447 1718,540 1713,545 685,545
GND on SIGNAL "GND_L01_P031" (solid, remove dead copper, pour order 31): 391,2459 514,2336 769,2336 797,2364 797,2943 775,2965 616,2965 587,2936 587,2540 548,2501 402,2501 391,2490
VIN on SIGNAL "VIN_L01_P030" (solid, remove dead copper, pour order 30): 109,2425 132,2402 331,2402 371,2442 371,2488 394,2511 545,2511 576,2542 576,2937 548,2965 289,2965 268,2944 268,2828 287,2809 342,2809 367,2784 367,2635 348,2616 133,2616 109,2592
GND on GROUND "GND_L02_P041" (solid, remove dead copper, pour order 41): 118.36,201.69 cw(c118.4,319.85) 0.25,319.8 0.25,2855.24 cw(c118.34,2855.26) 118.36,2973.35 3425.45,2973.35 cw(c3425.54,2855.33) 3543.56,2855.24 3543.56,319.8 cw(c3425.47,319.78) 3425.45,201.69
VCC12V on GROUND "VCC12V_L02_P032" (solid, remove dead copper, pour order 32): 814,2667 814,1674 830,1658 1198,1658 1198,201.69 53.31,201.69 0,255 0,2550 494,2550 611,2667
VBUS on SIGNAL (Bottom) "VBUS_L04_P042" (solid, remove dead copper, pour order 42): 1382,2760 1372,2750 1372,2697 1398,2671 1398,2543 1370,2515 1370,2342 1385,2327 2293,2327 2302,2336 2302,2369 2297,2374 1758,2374 1712,2420 1646,2420 1577,2489 1577,2750 1567,2760

## Keep-outs
Keep-Out Layer:
  lines w0.5: 0.25,319.8 ccw(c118.4,319.85) 118.36,201.69 3425.45,201.69 ccw(c3425.54,319.71) 3543.56,319.8 3543.56,2855.24 ccw(c3425.54,2855.33) 3425.45,2973.35 118.36,2973.35 ccw(c118.4,2855.19) 0.25,2855.24 0.25,319.8 ; 512.06,668.11 ccw(c630.15,668.09) 630.17,550 2638.05,550 ccw(c2638.14,668.02) 2756.16,668.11 2756.16,1101.57 ccw(c2638.14,1101.67) 2638.05,1219.69 630.17,1219.68 ccw(c630.15,1101.6) 512.06,1101.57 512.06,668.11 ; 512.06,1776.06 ccw(c630.21,1776.11) 630.17,1657.95 2638.05,1657.95 ccw(c2638.07,1776.04) 2756.16,1776.06 2756.16,2209.57 ccw(c2638.07,2209.59) 2638.05,2327.68 630.17,2327.68 ccw(c630.21,2209.52) 512.06,2209.57 512.06,1776.06

## Other copper
SIGNAL:
  region net GND: 1208.29,2752 1203,2746.71 1203,2704.52 1207.52,2700 1242.21,2700 1246.98,2704.76 1246.98,2746.48 1241.45,2752
  region net GND: 1332,2763 1347,2748 1368,2748 1384,2764 1438,2764 1448,2774 1448,2827 1441,2834 1342,2834 1332,2824
  region net GND: 1332,2395 1347,2380 1368,2380 1384,2396 1438,2396 1448,2406 1448,2459 1441,2466 1342,2466 1332,2456
  region net GND: 423,1695 448,1695 454,1701 454,1724 469,1739 499,1739 504,1734 504,1665 496,1657 426,1657 420,1663 420,1692
  region net GND: 423,1004.28 448,1004.28 454,1010.28 454,1033.28 469,1048.28 499,1048.28 504,1043.28 504,974.28 496,966.28 426,966.28 420,972.28 420,1001.28
  region net GND: 423,300 448,300 454,306 454,329 469,344 499,344 504,339 504,270 496,262 426,262 420,268 420,297
  region net VCC5V-C: 320,313 429,313 472,356 494.89,356 503.89,365 503.89,438 495.89,446 445.89,446 439.89,452 439.89,589 427.89,601 312.89,601 301.89,590 301.89,331.11
  region net VCC5V-B: 320,1018 429,1018 472,1061 494.89,1061 503.89,1070 503.89,1143 495.89,1151 445.89,1151 439.89,1157 439.89,1294 427.89,1306 312.89,1306 301.89,1295 301.89,1036.11
  region net VCC5V-A: 320,1708 429,1708 472,1751 494.89,1751 503.89,1760 503.89,1833 495.89,1841 445.89,1841 439.89,1847 439.89,1984 427.89,1996 312.89,1996 301.89,1985 301.89,1726.11
  region net NetC140_2: 111,474 107,470 107,382 117,372 171,372 178,365 178,344 186,336 265,336 271,342 271,433 264,440 188,440 176,428 175,427 143,427 138,432 138,470 134,474
  region net NetC128_2: 111,1179 107,1175 107,1087 117,1077 171,1077 178,1070 178,1049 186,1041 265,1041 271,1047 271,1138 264,1145 188,1145 176,1133 175,1132 143,1132 138,1137 138,1175 134,1179
  region net NetC4_2: 111,1869 107,1865 107,1777 117,1767 171,1767 178,1760 178,1739 186,1731 265,1731 271,1737 271,1828 264,1835 188,1835 176,1823 175,1822 143,1822 138,1827 138,1865 134,1869
  region net GND: 279,825 271,817 271,726 279,718 343,718 352,727 352,814 341,825
  region net GND: 279,1530 271,1522 271,1431 279,1423 343,1423 352,1432 352,1519 341,1530
  region net GND: 279,2220 271,2212 271,2121 279,2113 343,2113 352,2122 352,2209 341,2220
  region net VCC12V: 99,1831 92,1824 15,1824 5,1834 5,1988 13,1996 113,1996 117,1992 117,1933 101,1917 91,1907 91,1879 99,1871
  region net VCC12V: 99,1141 92,1134 15,1134 5,1144 5,1298 13,1306 113,1306 117,1302 117,1243 101,1227 91,1217 91,1189 99,1181
  region net VCC12V: 99,436 92,429 15,429 5,439 5,593 13,601 113,601 117,597 117,538 101,522 91,512 91,484 99,476
  region net VCC12V: 63,2328 53,2318 53,2245 63,2235 250,2235 261,2246 261,2318 251,2328 222,2328
  region net NetC3_2: 1253.09,2713.67 1257.76,2709 1287.16,2709 1291.2,2713.04 1291.2,2797.8 1275,2814 1070,2814 1056,2800 1056,2709 1064,2701 1191.32,2701 1198.28,2707.96 1198.28,2750.39 1203.89,2756 1248,2756 1253.09,2750.91
  region net VCC1.05V-VL822: 863,2899 863,2785 876,2772 1041,2772 1049,2780 1049,2803 1066,2820 1142,2820 1155,2833 1155,2955 1144,2966 1029,2966 1015,2952 1015,2925 1003,2913 877,2913
  region net VCC3.3V-VL822: 863,2531 863,2417 876,2404 1041,2404 1049,2412 1049,2435 1066,2452 1142,2452 1155,2465 1155,2587 1144,2598 1029,2598 1015,2584 1015,2557 1003,2545 877,2545
  region net GND: 1208.29,2384 1203,2378.71 1203,2336.52 1207.52,2332 1242.21,2332 1246.98,2336.76 1246.98,2378.48 1241.45,2384
  region net NetC17_2: 1253.09,2345.67 1257.76,2341 1287.16,2341 1291.2,2345.04 1291.2,2429.8 1275,2446 1070,2446 1056,2432 1056,2341 1064,2333 1191.32,2333 1198.28,2339.96 1198.28,2382.39 1203.89,2388 1248,2388 1253.09,2382.91
  region net VBUS: 1303,2392 1297,2386 1297,2340 1303,2334 1442.24,2334 1446.71,2338.47 1446.71,2384.29 1440,2391 1387,2391 1371,2375 1346,2375 1329,2392 1302,2392
  region net VBUS: 1303,2760 1297,2754 1297,2708 1303,2702 1442.24,2702 1446.71,2706.47 1446.71,2752.29 1440,2759 1387,2759 1371,2743 1346,2743 1329,2760 1302,2760
SIGNAL (Bottom):
  region net VCC5V-C: 953,338 959,332 1095,332 1101,338 1101,449 1094,456 961,456 953,448
  region net VCC5V-B: 953,1445.98 959,1439.98 1095,1439.98 1101,1445.98 1101,1556.98 1094,1563.98 961,1563.98 953,1555.98
  region net VCC5V-A: 953,2551.24 959,2545.24 1095,2545.24 1101,2551.24 1101,2662.24 1094,2669.24 961,2669.24 953,2661.24
  region net VCC12V: 653,2551.24 659,2545.24 795,2545.24 801,2551.24 801,2662.24 794,2669.24 661,2669.24 653,2661.24
  region net VCC12V: 653,1445.98 659,1439.98 795,1439.98 801,1445.98 801,1556.98 794,1563.98 661,1563.98 653,1555.98
  region net VCC12V: 653,338 659,332 795,332 801,338 801,449 794,456 661,456 653,448
  region net LXO-A: 3144.89,611.84 3140.68,607.63 3113.43,607.63 3104.9,599.1 2995.36,599.1 2973.89,577.62 2957.89,561.62 2863.89,561.62 2859.89,565.62 2859.89,633.62 2863.89,637.62 2968.89,637.62 2979.89,626.62 3080.89,626.62 3086.33,621.18 3141.93,621.18 3144.89,618.22
  region net LXO-B: 3144.89,1362.84 3140.68,1358.63 3113.43,1358.63 3104.9,1350.1 2990.1,1350.1 2952.62,1312.62 2863.89,1312.62 2859.89,1316.62 2859.89,1384.62 2863.89,1388.62 2968.89,1388.62 2979.89,1377.62 3080.89,1377.62 3086.33,1372.18 3141.93,1372.18 3144.89,1369.22
  region net LXO-C: 3145,2123.21 3140.79,2119 3113.54,2119 3105.01,2110.47 2995.47,2110.47 2974,2089 2958,2073 2864,2073 2860,2077 2860,2145 2864,2149 2969,2149 2980,2138 3081,2138 3086.44,2132.56 3142.04,2132.56 3145,2129.6
  region net VCC1V2-A: 3072,387.72 3068,383.72 3040,383.72 3035,388.72 3035,398.72 3028.21,405.51 2991.24,405.51 2986,400.26 2986,366.72 2980,360.72 2869,360.72 2862,367.72 2862,453.72 2866,457.72 2985.28,457.72 3005.28,437.72 3059,437.72 3072,424.72
  region net VCC1V2-B: 3072,1139 3068,1135 3040,1135 3035,1140 3035,1150 3029,1156 2991,1156 2986,1151 2986,1118 2980,1112 2869,1112 2862,1119 2862,1205 2866,1209 2984,1209 3004,1189 3059,1189 3072,1176
  region net VCC1V2-C: 3072,1899 3068,1895 3040,1895 3035,1900 3035,1910 3029,1916 2990,1916 2986,1912 2986,1878 2980,1872 2869,1872 2862,1879 2862,1965 2866,1969 2978,1969 2998,1949 3059,1949 3072,1936

## Silkscreen, mask and mechanical layers (free items; w line width, h text height)
Top Overlay:
  region: 2830 vertices and 111 holes, not listed, extent 3066.39,680.89 3486.42,1131.69
  text "2025/12/29" at 3252,2454 h60 r270
  text "misaka10039" at 3350,2454 h60 r270
  text "USB3.1 Gen2/10Gpbs" at 3447.99,2454 h60 r270
  text "Changeo Tec" at 3066.32,2444 h100 r270
  text "Ver0.3" at 3252,1744.23 h60 r270
Mechanical 1:
  lines w0.5: 0.25,319.8 ccw(c118.4,319.85) 118.36,201.69 3425.45,201.69 ccw(c3425.47,319.78) 3543.56,319.8 3543.56,2855.24 ccw(c3425.54,2855.33) 3425.45,2973.35 118.36,2973.35 ccw(c118.34,2855.26) 0.25,2855.24 0.25,319.8 ; 512.06,668.11 ccw(c630.15,668.09) 630.17,550 2638.05,550 ccw(c2638.14,668.02) 2756.16,668.11 2756.16,1101.57 ccw(c2638.14,1101.67) 2638.05,1219.69 630.17,1219.68 ccw(c630.15,1101.6) 512.06,1101.57 512.06,668.11 ; 512.06,1776.06 ccw(c630.21,1776.11) 630.17,1657.95 2638.05,1657.95 ccw(c2638.07,1776.04) 2756.16,1776.06 2756.16,2209.57 ccw(c2638.07,2209.59) 2638.05,2327.68 630.17,2327.68 ccw(c630.21,2209.52) 512.06,2209.57 512.06,1776.06